# Altium PCB MICRO-GRUPO_5-5A.pcbDoc.PcbDoc
Units mm, origin at the board's own origin, x right, y up, seen from the top; angles counter-clockwise.
Board outline 72.14 x 49.15 mm, 2 copper layers (Top Layer, Bottom Layer); 28 components, 37 nets, 141 pads, 20 vias.
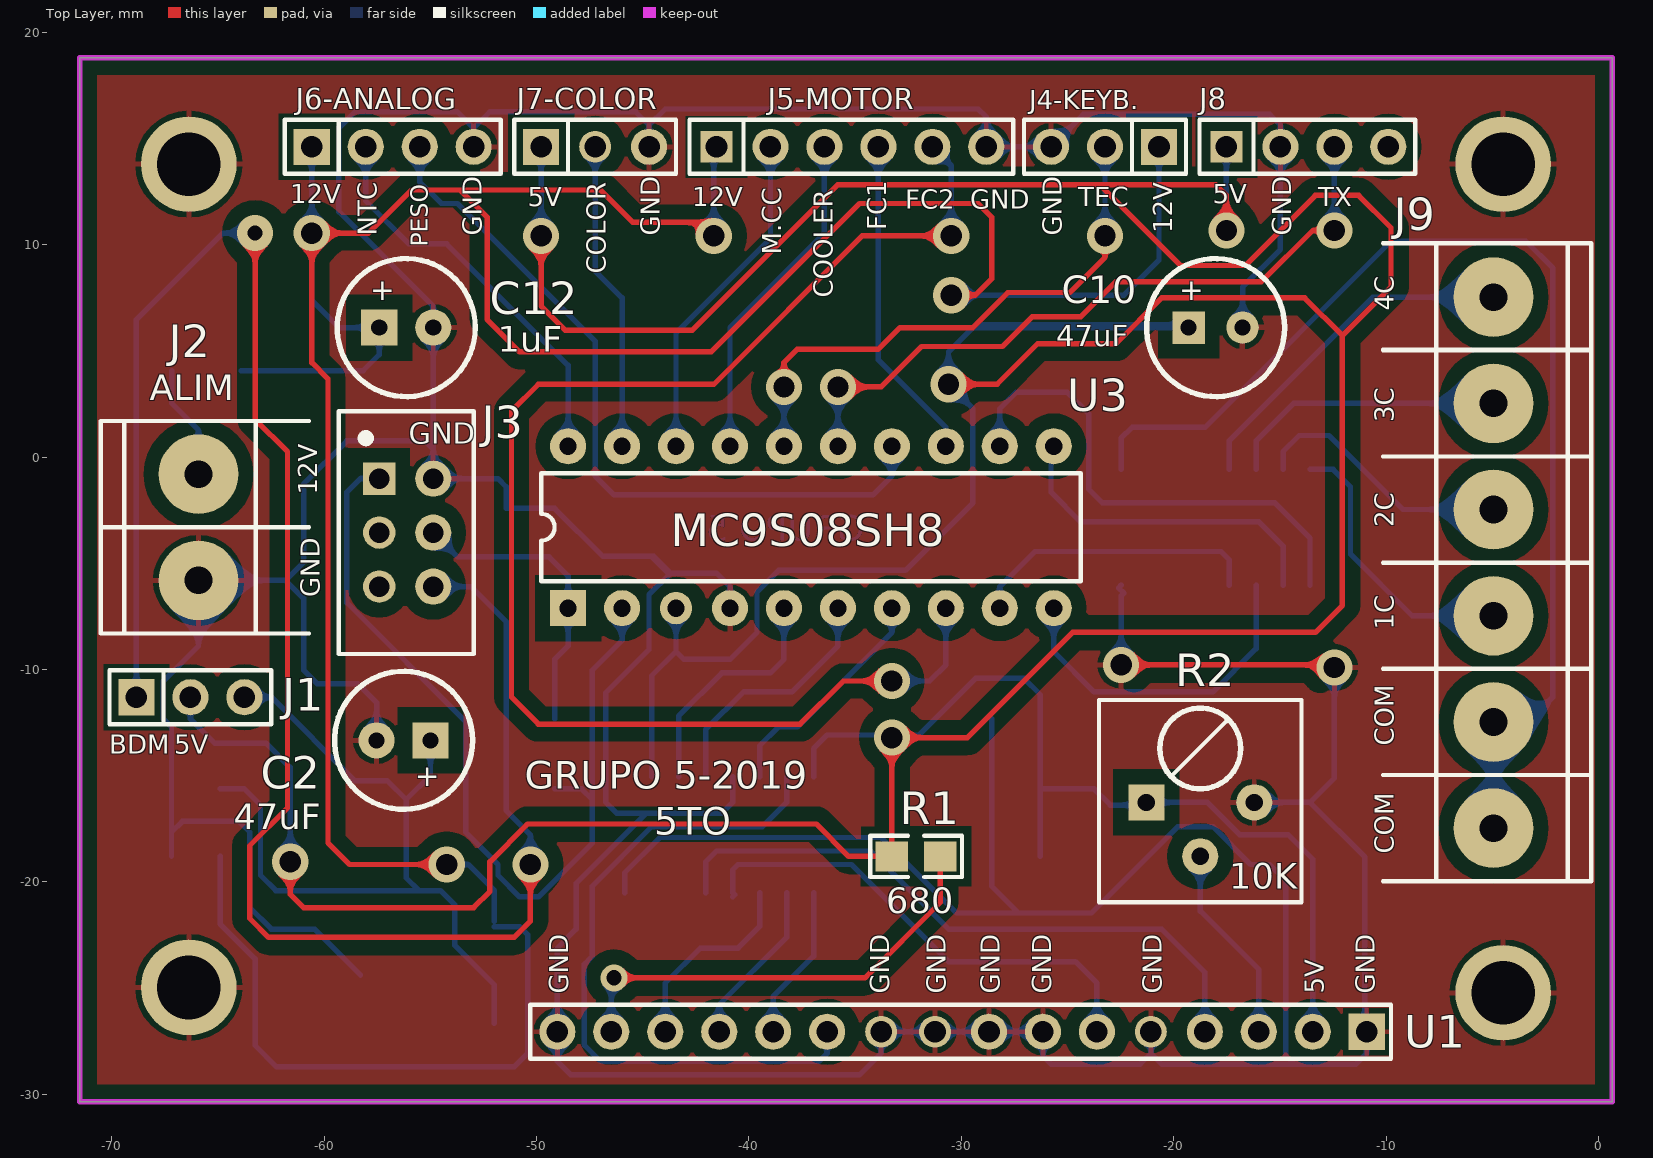
[diagram p0: Top Layer view]
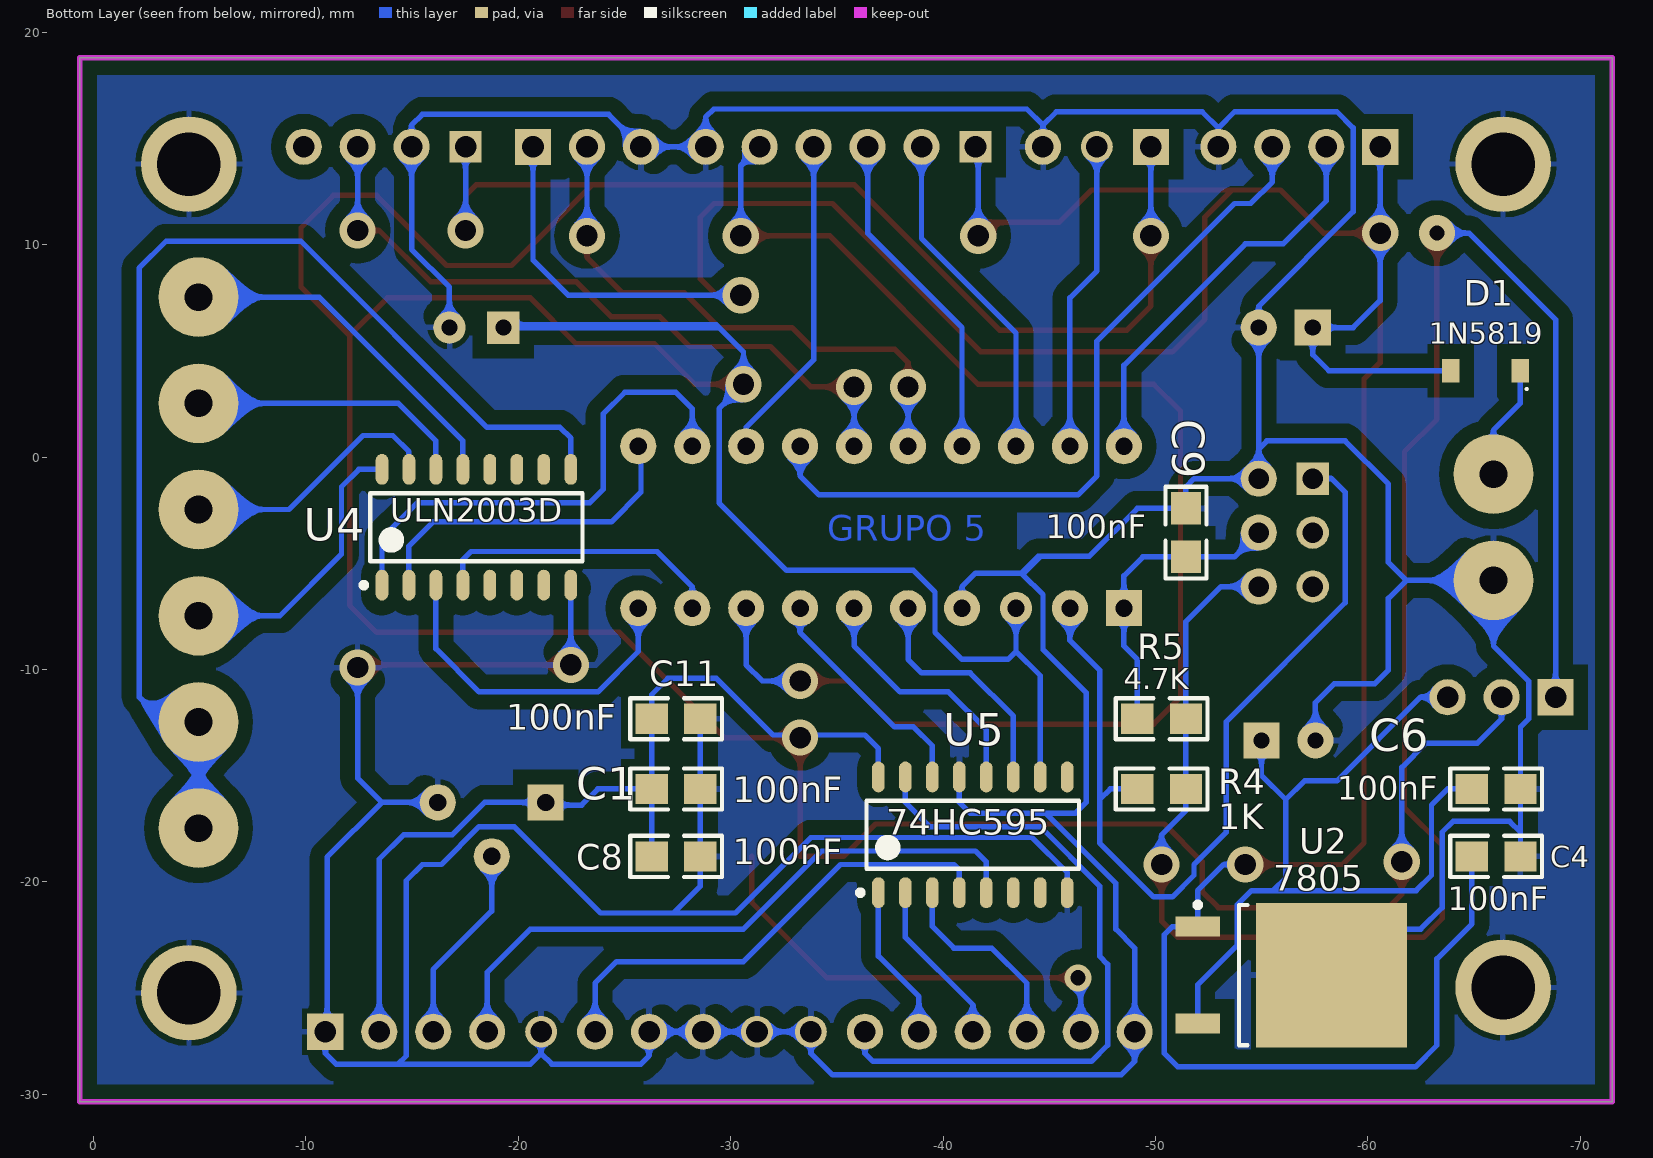
[diagram p1: Bottom Layer view, seen from below]

## Layer stack, top to bottom
Top Solder: solder mask 0.0102, Solder Resist, Dk 3.5
Top Layer: signal copper 0.0356
Dielectric 1: dielectric 0.32, FR-4, Dk 4.8
Bottom Layer: signal copper 0.0356
Bottom Solder: solder mask 0.0102, Solder Resist, Dk 3.5

## Board outline
-71.501,18.796 -71.501,-30.353 0.635,-30.353 0.635,18.796

## Design rules (kind name [scope] priority, off if disabled: settings)
Clearance Clearance_polygon [InPolygon] p1: gap=0.7
Clearance [All] p2: gap=0.254
PolygonConnect [All] p1: connectstyle=Relief reliefconductorwidth=0.254 reliefentries=4 polygonreliefangle="90 Angle" airgapwidth=0.254
RoutingVias [All] p1: holewidth=0.711 width=1.27 viastyle="Through Hole" minholewidth=0.711 minwidth=1.27 maxholewidth=0.711 maxwidth=1.27
SolderMaskExpansion [All] p1: expansion=0.102
UnpouredPolygon [All] p1: allowunpoured=FALSE
Width [All] p1: maxlimit=0.254 minlimit=0.254 preferedwidth=0.254
29 further rules are at their usual default settings.

## Components (designator, comment, footprint, x,y, rotation, side; value= is the part's Value field where it differs from the comment)
C1 "100nF" 0805 -27.432,-15.621 r0 bottom
C2 "47uF" CAPOL#1 -56.261,-13.335 r180 top
C4 "100nF" 0805 -66.04,-18.796 r180 bottom
C6 "100nF" 0805 -66.04,-15.621 r180 bottom
C8 "100nF" 0805 -27.432,-18.796 r0 bottom
C9 "100nF" 0805 -51.435,-3.556 r90 bottom
C10 "47uF" CAPOL#2 -18.034,6.096 r0 top
C11 "100nF" 0805 -27.432,-12.319 r180 bottom
C12 "1uF" CAPOL#1 -56.134,6.096 r0 top
D1 "1N5819" DIODO -65.532,4.064 r0 bottom
J1 "POWER SELECT" JUMPER_3 -66.294,-11.303 r0 top
J2 "ALIM" BORNERA2 -65.913,-3.302 r0 top
J3 "BDM_FREESCALE" SIP3*2 -57.404,-1.016 r270 top
J4-KEYB. "Teclado" SIP3#1 -23.241,14.605 r180 top (schematic designator J4)
J5-MOTOR "MOTOR CC" SIP6 -41.529,14.605 r0 top (schematic designator J5)
J6-ANALOG "S.ANALOG" SIP4#1 -56.769,14.605 r0 top (schematic designator J6)
J7-COLOR "S.DIG" SIP3#2 -47.244,14.605 r0 top (schematic designator J7)
J8 "communication" SIP4#2 -13.716,14.605 r0 top
J9 "MOTOR PP" BORNERA6 -4.953,-4.953 r180 top
R1 "680" 0805 -32.131,-18.796 r180 top
R2 "PRESET" "PRESET H" -18.796,-16.256 r0 top
R4 "1K" 0805 -50.292,-15.621 r180 bottom
R5 "4.7K" 0805 -50.292,-12.319 r180 bottom
U1 "LCD" LCD -21.082,-27.051 r180 top
U2 "7805" "7805 smd" -56.388,-24.384 r180 bottom
U3 "MC9S08SH8" DIP20 -48.514,-7.112 r90 top
U4 "ULN2003D" SOIC16 -18.034,-3.302 r90 bottom
U5 "74HC595" 74hc595_v2 -41.402,-17.78 r90 bottom

## Footprints (in the part's own frame and the unit in brackets; to place one, negate y for a bottom-side part, rotate by r counter-clockwise, add the part's x,y. Pads: shape width x height; smd on the part's side, far side on the other; paste and mask are expansions set on the pad)
74hc595_v2 [mm]
  oval 1.45x0.6 smd: 1(-2.725,4.445) 2(-2.725,3.175) 3(-2.725,1.905) 4(-2.725,0.635) 5(-2.725,-0.635) 6(-2.725,-1.905) 7(-2.725,-3.175) 8(-2.725,-4.445) 9(2.725,-4.445) 10(2.725,-3.175) 11(2.725,-1.905) 12(2.725,-0.635) 13(2.725,0.635) 14(2.725,1.905) 15(2.725,3.175) 16(2.725,4.445)
  silkscreen extent -2.85,-5 1.6,5.42, body extent -2,-5 2,5, height 1.75
0805 [mil] "Pasivo 0805"
  rect 60x56 smd: 1(-45,0) 2(45,0)
  silkscreen extent -85,-38 85,38, body extent -40,-24 39,25, height 15
"7805 smd" [mm] "D-PAK, 3-Pads, Body 6,20x6,66mm (max), IPC Medium Density"
  rect 2.1x0.95 smd: 1(-4.4,2.28) 3(-4.4,-2.28)
  rect 7.1x6.8 smd: 2(1.9,0)
  silkscreen extent -4.52,-3.3 -2.05,3.43, body extent -2.45,-3.3 3.75,3.3, height 2.4
BORNERA2 [mm] "Bornera con Tornillos 5mm separaci�n"
  round 3.75 hole 1.3: 1(0,2.5) 2(0,-2.5)
  silkscreen extent -4.6,-5 5.2,5, body extent -3.76,-4.89 3.94,5.61, height 10
BORNERA6 [mm] "Bornera con Tornillos 5mm separaci�n"
  round 3.75 hole 1.3: 1(0,12.517) 2(0,7.517) 3(0,2.516) 4(0,-2.484) 5(0,-7.484) 6(0,-12.484)
  silkscreen extent -4.6,-15.02 5.2,15.02, body extent -3.76,-14.86 3.94,15.62, height 10.05
CAPOL#1 [mm] "Body diameter 6.5mm"
  rect 1.7x1.7 hole 0.762: 1(-1.27,0)
  round 1.7 hole 0.762: 2(1.27,0)
  silkscreen extent -3.25,-3.25 3.25,3.25, body extent -3.15,-3.18 3.2,3.18, height 11.53
CAPOL#2 [mm] "Body diameter 6.5mm"
  rect 1.524x1.524 hole 0.762: 1(-1.27,0)
  round 1.524 hole 0.762: 2(1.27,0)
  silkscreen extent -3.25,-3.25 3.25,3.25, body extent -3.15,-3.18 3.2,3.18, height 11.53
DIODO [mm] "SODFL, 2-Leads, Body 1,60x3,60mm, IPC Medium Density"
  rect 0.81x1.12 smd: 1(-1.635,0) 2(1.635,0)
  silkscreen extent -1.99,0.81 -1.89,0.91, body extent -1.4,-0.85 1.4,0.85, height 1.3
DIP20 [mm]
  rect 1.7x1.7 hole 0.813: 1(0,0)
  round 1.7 hole 0.813: 2(0,-2.54) 4(0,-7.62) 5(0,-10.16) 6(0,-12.7) 7(0,-15.24) 8(0,-17.78) 9(0,-20.32) 10(0,-22.86) 11(7.62,-22.86) 12(7.62,-20.32) 13(7.62,-17.78) 14(7.62,-15.24) 15(7.62,-12.7) 16(7.62,-10.16) 17(7.62,-7.62) 18(7.62,-5.08) 19(7.62,-2.54) 20(7.62,0)
  round 1.524 hole 0.813: 3(0,-5.08)
  silkscreen extent 1.27,-24.13 6.35,1.27, body extent -1.29,-24.2 8.71,1.4, height 10
JUMPER_3 [mm]
  rect 1.7x1.7 hole 1.016: 1(-2.54,0)
  round 1.7 hole 1.016: 2(0,0) 3(2.54,0)
  silkscreen extent -3.81,-1.27 3.81,1.27, body extent -3.81,-1.3 3.81,1.27, height 16.15
LCD [mm]
  rect 1.7x1.7 hole 1.016: 1(-10.16,0)
  round 1.7 hole 1.016: 2(-7.62,0) 3(-5.08,0) 4(-2.54,0) 6(2.54,0) 7(5.08,0) 8(7.62,0) 11(15.24,0) 12(17.78,0) 13(20.32,0) 14(22.86,0) 15(25.4,0) 16(27.94,0)
  round 1.5 hole 1.016: 5(0,0) 9(10.16,0) 10(12.7,0)
  silkscreen extent -11.3,-1.27 29.21,1.27, body extent -11.43,-1.27 29.21,1.27, height 8.38
"PRESET H" [mm]
  rect 1.7x1.7 hole 0.813: 1(-2.5,0)
  round 1.7 hole 0.813: 2(0.04,-2.54) 3(2.58,0)
  silkscreen extent -4.72,-4.7 4.8,4.83, body extent -4.83,-4.76 4.7,4.77, height 5
SIP3#1 [mm]
  rect 1.7x1.7 hole 1.016: 1(-2.54,0)
  round 1.7 hole 1.016: 2(0,0) 3(2.54,0)
  silkscreen extent -3.81,-1.27 3.81,1.27, body extent -3.81,-1.3 3.81,1.24, height 8.38
SIP3#2 [mm]
  rect 1.7x1.7 hole 1.016: 1(-2.54,0)
  round 1.5 hole 1.016: 2(0,0)
  round 1.7 hole 1.016: 3(2.54,0)
  silkscreen extent -3.81,-1.27 3.81,1.27, body extent -3.81,-1.3 3.81,1.24, height 8.38
SIP3*2 [mil]
  rect 60x60 hole 38: 1(0,0)
  round 66.93 hole 38: 2(0,100) 4(100,100) 6(200,100)
  round 60 hole 38: 3(100,0) 5(200,0)
  silkscreen extent -125,-75 325,175, body extent -50,-51 250,149, height 398
SIP4#1 [mm]
  rect 1.7x1.7 hole 1.016: 1(-3.81,0)
  round 1.7 hole 1.016: 2(-1.27,0) 3(1.27,0) 4(3.81,0)
  silkscreen extent -5.08,-1.27 5.08,1.27, body extent -5.08,-1.27 5.08,1.27, height 8.38
SIP4#2 [mm]
  rect 1.5x1.5 hole 1.016: 1(-3.81,0)
  round 1.7 hole 1.016: 2(-1.27,0) 3(1.27,0) 4(3.81,0)
  silkscreen extent -5.08,-1.27 5.08,1.27, body extent -5.08,-1.27 5.08,1.27, height 8.38
SIP6 [mm]
  rect 1.5x1.5 hole 1.016: 1(0,0)
  round 1.7 hole 1.016: 2(2.54,0) 3(5.08,0) 4(7.62,0) 5(10.16,0) 6(12.7,0)
  silkscreen extent -1.27,-1.27 13.97,1.27, body extent -1.27,-1.3 13.97,1.24, height 8.38
SOIC16 [mm] "controlador de corriente"
  oval 1.45x0.6 smd: 1(-2.725,4.445) 2(-2.725,3.175) 3(-2.725,1.905) 4(-2.725,0.635) 5(-2.725,-0.635) 6(-2.725,-1.905) 7(-2.725,-3.175) 8(-2.725,-4.445) 9(2.725,-4.445) 10(2.725,-3.175) 11(2.725,-1.905) 12(2.725,-0.635) 13(2.725,0.635) 14(2.725,1.905) 15(2.725,3.175) 16(2.725,4.445)
  silkscreen extent -2.85,-5 1.6,5.42, body extent -2,-5 2,5, height 1.75

## Part data
C1 C4 C6 C8 C9 C11: library part CAP, "cap"
C2 C10 C12: library part CAPPOL, "Cap polarizado"
D1: library part "DIODO SCHOTTKY", "Diodo"
J1: library part JUMPER_3, "Jumper"
J2: library part Bornera_2, "Bornera de 2 pines"
J3: library part BDM, "BDM"
J4-KEYB. J7-COLOR: library part CON3
J5-MOTOR: library part CON6
J6-ANALOG J8: library part CON4
J9: library part "BORNERA 6", "current output"
R1 R4 R5: library part RES, "Resistencia"
U1: library part "LCD 16*4"
U2: library part 78XX, "REGULDOR POSITIVO"
U3: "Micro controlador"
U4: "Controlador de corriente"

## Free pads (board coordinates)
  round 4.5 hole 3: 0(-66.366,-24.964) 1(-66.366,13.788) 2(-4.5,13.788) 3(-4.5,-25.218)

## Via types
v1: diameter 1.7, hole 1, Top Layer to Bottom Layer, 18 vias
v2: diameter 1.7, hole 0.7, Top Layer to Bottom Layer, 1 vias
v3: diameter 1.27, hole 0.711, Top Layer to Bottom Layer, 1 vias

## Nets (pads, with @x,y where several pads share a name; then routed paths per layer and width w, separated by ;. In a path a pad name is that pad's centre, name@x,y a point inside that pad or via, vN(x,y) a via of type N, cw(c..) or ccw(c..) an arc to the next point about the centre after c; other vN are vias at no path point)
5V: C1.2 C8.2 C10.1 C11.1 J1.2 J7-COLOR.1 J8.1 R1.2 R2.1 U1.2 U3.3 U5.10 U5.16 | length 279.6
  Top Layer w0.254: v1(-61.595,-19.05) -61.595,-20.574 -60.96,-21.209 -52.959,-21.209 -52.197,-20.447 -52.197,-19.05 -50.419,-17.272 -36.83,-17.272 -35.306,-18.796 R1.2 v1(-33.274,-13.208) -29.718,-13.208 -24.765,-8.255 -13.335,-8.255 -12.065,-6.985 -12.065,5.715 ; v1(-49.784,10.414) -49.784,7.112 -48.641,5.969 -42.672,5.969 -35.814,12.827 -23.495,12.827 ; v1(-30.607,3.429) -28.321,3.429 -26.416,5.334 -22.733,5.334 -20.574,7.493 -13.843,7.493 -12.065,5.715 ; v1(-17.526,10.668) -17.526,12.319 -18.034,12.827 -23.495,12.827 ; -23.495,12.827 -19.685,9.017 -16.637,9.017 -13.335,12.319 -11.303,12.319 -9.779,10.795 -9.779,8.001 -12.065,5.715
  Bottom Layer w0.254: J1.2 -66.294,-12.319 -65.151,-13.462 -62.738,-13.462 -61.595,-14.605 v1(-61.595,-19.05) ; v1(-49.784,10.414) J7-COLOR.1 ; U5.10 -44.577,-10.287 -43.434,-9.144 ; U3.3 -43.434,-9.144 ; U5.16 -36.957,-13.716 -36.322,-13.081 -32.004,-13.081 -29.337,-10.414 -27.051,-10.414 -26.289,-11.176 C11.1 C1.2 ; C8.2 C1.2 ; v1(-17.526,10.668) J8.1 ; U1.2 -13.462,-18.923 -14.605,-17.78 -16.891,-17.78 -18.415,-16.256 R2.1 -21.423,-16.383 -22.987,-16.383 -23.749,-15.621 C1.2 ; -43.434,-9.144 -43.053,-9.525 -40.894,-9.525 -39.624,-8.255 -39.624,-6.35 -38.608,-5.334 -32.639,-5.334 -29.464,-2.159 -29.464,2.286 v1(-30.607,3.429) -30.607,4.953 -29.464,6.096 ; -29.464,6.096 C10.1 -19.431,6.223 -29.337,6.223 -29.464,6.096
12V: C4.1 C12.1 D1.2 J4-KEYB..1 J5-MOTOR.1 J6-ANALOG.1 U2.1 | length 168.5
  Top Layer w0.254: v1(-54.229,-19.177) -58.801,-19.177 -59.817,-18.161 -59.817,3.683 -60.579,4.445 v1(-60.579,10.541) -57.912,10.541 -55.88,12.573 -53.594,12.573 ; v1@-41.529,11.049 -45.466,11.049 -46.99,12.573 -53.594,12.573 ; v1(-30.48,7.62) -29.337,7.62 -28.575,8.382 -28.575,11.303 -29.21,11.938 -34.798,11.938 -41.783,4.953 -50.8,4.953 -52.324,6.477 -52.324,11.303 -53.594,12.573
  Bottom Layer w0.254: C4.1 -64.897,-21.971 -63.246,-23.622 -63.246,-27.686 -62.23,-28.702 -51.054,-28.702 -50.419,-28.067 -50.419,-22.479 -50.794,-22.104 U2.1 ; D1.2 -58.166,4.064 -57.404,4.826 C12.1 -59.309,6.096 -60.579,7.366 v1(-60.579,10.541) J6-ANALOG.1 ; v1(-54.229,-19.177) -53.213,-19.177 -51.988,-20.402 U2.1@-51.988,-21.85 ; v1(-41.656,10.414) -41.656,14.478 J5-MOTOR.1 ; v1(-30.48,7.62) -22.352,7.62 -20.701,9.271 J4-KEYB..1
COLOR: J7-COLOR.2 U3.19 | length 14.6
  Bottom Layer w0.254: J7-COLOR.2 -47.244,8.763 -45.974,7.493 U3.19
COM_TX: J8.3 U3.15 | length 33.2
  Top Layer w0.254: v1(-35.814,3.302) -33.782,3.302 -31.877,5.207 -28.067,5.207 -26.67,6.604 -24.384,6.604 -22.733,8.255 -15.875,8.255 -13.462,10.668 v1(-12.446,10.668)
  Bottom Layer w0.254: U3.15 v1(-35.814,3.302) ; v1(-12.446,10.668) J8.3
COOLER: J5-MOTOR.3 U3.17 | length 15.9
  Bottom Layer w0.254: U3.17 -40.894,3.302 -40.894,6.096 -36.449,10.541 J5-MOTOR.3
FC1: J5-MOTOR.4 U3.13 | length 15.4
  Bottom Layer w0.254: J5-MOTOR.4 -33.909,4.572 -30.734,1.397 U3.13
FC2: J5-MOTOR.5 U3.8 | length 66.9
  Top Layer w0.254: v1(-33.274,-10.541) -35.56,-10.541 -37.592,-12.573 -49.911,-12.573 -51.181,-11.303 -51.181,2.159 -49.911,3.429 -41.656,3.429 -34.671,10.414 v1(-30.48,10.414)
  Bottom Layer w0.254: v1(-33.274,-10.541) -31.496,-10.541 -30.734,-9.779 U3.8 ; J5-MOTOR.5 -30.48,13.716 v1(-30.48,10.414)
GND: C1.1 C2.2 C4.2 C6.2 C8.1 C9.2 C10.2 C11.2 C12.2 J2.2 J3.2 J4-KEYB..3 J5-MOTOR.6 J6-ANALOG.4 J7-COLOR.3 J8.2 pad.0 pad.1 pad.2 pad.3 R2.3 U1.1 U1.5 U1.7 U1.8 U1.9 U1.10 U1.16 U2.2 U3.4 U4.8 U5.8 U5.13 | length 319.6
  Top Layer w0.254: v1(-22.479,-9.779) -12.573,-9.779 v1(-12.446,-9.906)
  Bottom Layer w0.254: C4.2 -67.183,-17.653 ; U2.2 -60.447,-22.225 -62.484,-22.225 -63.5,-21.209 -63.5,-17.653 -64.008,-17.145 -66.675,-17.145 -67.183,-17.653 ; C2.2 -57.531,-11.557 -58.42,-10.668 -60.325,-10.668 -60.96,-10.033 -60.96,-6.651 -61.809,-5.802 ; J6-ANALOG.4 -52.959,15.494 ; U5.8 -45.847,-19.558 -44.196,-17.907 -33.782,-17.907 -30.226,-21.463 -27.305,-21.463 ; J7-COLOR.3 -44.704,15.621 ; U3.4 -40.894,-6.096 -41.529,-5.461 -43.688,-5.461 -44.485,-4.664 -44.612,-4.664 ; U5.13 -40.767,-16.256 -41.275,-16.764 -44.831,-16.764 ; C11.2 C1.1 C8.1 -28.575,-20.193 -27.305,-21.463 ; v1(-22.479,-9.779) -22.479,-6.535 -22.352,-6.408 -22.606,-6.154 U4.8 ; U1.5 -21.082,-28.067 ; C10.2@-16.764,6.223 -16.764,8.001 -14.986,9.779 J8.2 -14.986,15.621 -15.494,16.129 -24.257,16.129 J4-KEYB..3 J5-MOTOR.6 -28.829,16.002 -29.21,16.383 -43.942,16.383 -44.704,15.621 ; R2.3 -13.589,-16.256 ; v1(-12.446,-9.906) -12.446,-15.113 -13.589,-16.256 ; -67.183,-17.653 C6.2 -67.183,-12.7 -67.564,-12.319 -67.564,-10.541 -65.913,-8.89 J2.2 -61.809,-5.802 ; -61.809,-5.802 -60.96,-4.953 -60.96,-1.27 -58.928,0.762 -55.245,0.762 -54.864,0.381 ; -54.864,0.381 J3.2 -51.816,-1.016 -51.435,-1.397 C9.2 -49.149,-2.413 -46.898,-4.664 -44.612,-4.664 ; -54.864,0.381 C12.2 -54.864,7.112 -59.309,11.557 -59.309,15.494 -58.547,16.256 -53.721,16.256 -52.959,15.494 ; -52.959,15.494 -52.197,16.256 -45.339,16.256 -44.704,15.621 ; -44.831,-16.764 -46.228,-16.764 -46.736,-16.256 -46.736,-11.093 -44.704,-9.061 -44.704,-6.477 -43.752,-5.524 -44.612,-4.664 ; -44.831,-16.764 -48.133,-20.066 -48.133,-22.225 -49.022,-23.114 U1.16 -49.022,-28.448 -48.387,-29.083 -34.798,-29.083 -33.782,-28.067 U1.10 U1.9 U1.8 U1.7 -26.162,-28.194 -25.781,-28.575 -21.59,-28.575 -21.082,-28.067 ; -27.305,-21.463 -23.876,-21.463 -19.812,-17.399 -18.161,-17.399 -16.383,-19.177 -15.494,-19.177 -14.732,-19.939 -14.732,-28.194 -14.351,-28.575 ; -21.082,-28.067 -20.574,-28.575 -14.351,-28.575 ; -14.351,-28.575 -11.43,-28.575 -10.922,-28.067 U1.1 -11.009,-26.964 -11.009,-18.836 -13.589,-16.256
LCD_CLK: U3.5 U5.11 | length 11.3
  Bottom Layer w0.254: U5.11 -43.307,-12.192 -41.275,-10.16 -38.989,-10.16 -38.354,-9.525 U3.5
LCD_DATA: U3.7 U5.14 | length 11
  Bottom Layer w0.254: U5.14 -39.497,-13.589 -38.608,-12.7 -37.719,-12.7 -33.274,-8.255 U3.7
LCD_HAB: U3.6 U5.12 | length 11.9
  Bottom Layer w0.254: U5.12 -42.037,-12.827 -40.259,-11.049 -37.973,-11.049 -35.814,-8.89 U3.6
"MOTOR CC": J5-MOTOR.2 U3.18 | length 15.9
  Bottom Layer w0.254: U3.18 -43.434,5.842 -38.989,10.287 J5-MOTOR.2
NetC2_1: C2.1 C6.1 J1.3 U2.3 | length 39
  Bottom Layer w0.254: C6.1 -63.754,-15.621 -62.992,-16.383 -62.992,-19.685 -62.269,-20.408 -55.538,-20.408 ; J1.3 -62.484,-11.303 -58.547,-15.24 -57.023,-15.24 -56.134,-16.129 ; C2.1 -54.991,-14.986 -56.134,-16.129 ; U2.3 -51.988,-24.847 -53.848,-22.987 -53.848,-21.081 -54.521,-20.408 -55.538,-20.408 ; -56.134,-16.129 -56.134,-19.812 -55.538,-20.408
NetC9_1: C9.1 J3.4 R5.1 U3.1 | length 14.2
  Bottom Layer w0.254: J3.4 -53.721,-4.699 C9.1 -49.403,-4.699 -48.514,-5.588 U3.1 -48.514,-8.89 -49.149,-9.525 R5.1
NetD1_1: D1.1 J2.1 | length 5.4
  Bottom Layer w0.254: D1.1 -67.167,2.524 -65.913,1.27 J2.1
NetJ3_1: J3.1 R4.1 U3.2 | length 42.3
  Bottom Layer w0.254: J3.1 -58.293,-1.016 -58.928,-1.651 -58.928,-6.858 -53.34,-12.446 -53.34,-17.653 -51.816,-19.177 -51.816,-19.685 -50.8,-20.701 -49.911,-20.701 -47.371,-18.161 -47.371,-16.129 ; R4.1 -47.879,-15.621 -47.371,-16.129 ; U3.2 -45.974,-8.636 -47.371,-10.033 -47.371,-16.129
NetJ9_1: J9.1 J9.2 U4.9 | length 54.6
  Bottom Layer w0.254: U4.9 -22.479,0.889 -21.971,1.397 -18.542,1.397 -9.779,10.16 -3.429,10.16 -2.159,8.89 -2.159,-11.303 -3.326,-12.47 J9.2 J9.1
NetJ9_3: J9.3 U4.16 | length 13.4
  Bottom Layer w0.254: U4.16 -12.504,-0.577 -11.684,-1.397 -11.684,-4.572 -8.787,-7.469 J9.3
NetJ9_4: J9.4 U4.15 | length 12.5
  Bottom Layer w0.254: U4.15 -14.859,0.254 -14.097,1.016 -12.7,1.016 -9.215,-2.469 J9.4
NetJ9_5: J9.5 U4.14 | length 13.2
  Bottom Layer w0.254: U4.14 -16.129,0.762 -14.36,2.531 J9.5
NetJ9_6: J9.6 U4.13 | length 16.6
  Bottom Layer w0.254: U4.13 -17.399,0.762 -10.63,7.531 J9.6
NetR1_1: R1.1 U1.15 | length 21.6
  Top Layer w0.254: v3(-46.355,-24.511) -34.544,-24.511 -30.988,-20.955 R1.1
  Bottom Layer w0.254: U1.15 -46.482,-24.638 v3(-46.355,-24.511)
NetR2_2: R2.2 U1.3 | length 9.4
  Bottom Layer w0.254: R2.2 -18.756,-21.376 -16.002,-24.13 U1.3
NetU1_4: U1.4 U5.5 | length 30.3
  Bottom Layer w0.254: U5.5 -42.037,-19.05 -41.529,-18.542 -34.29,-18.542 -30.607,-22.225 -20.574,-22.225 -18.542,-24.257 U1.4
NetU1_6: U1.6 U5.4 | length 23.1
  Bottom Layer w0.254: U5.4@-40.767,-20.701 U5.4@-40.669,-20.603 ; U5.4 -40.767,-19.431 -40.513,-19.177 -35.179,-19.177 -30.607,-23.749 -24.638,-23.749 -23.622,-24.765 U1.6
NetU1_11: U1.11 U5.15 | length 32.5
  Bottom Layer w0.254: U5.15 -38.227,-16.256 -39.37,-17.399 -44.577,-17.399 -47.371,-20.193 -47.371,-23.495 -47.752,-23.876 -47.752,-27.686 -46.99,-28.448 -36.703,-28.448 -36.322,-28.067 U1.11
NetU1_12: U1.12 U5.1 | length 7.3
  Bottom Layer w0.254: U1.12 -38.862,-25.4 -36.957,-23.495 U5.1
NetU1_13: U1.13 U5.2 | length 7.9
  Bottom Layer w0.254: U1.13 -41.402,-25.781 -38.227,-22.606 U5.2
NetU1_14: U1.14 U5.3 | length 9.4
  Bottom Layer w0.254: U1.14 -43.942,-24.765 -42.291,-23.114 -40.513,-23.114 -39.497,-22.098 U5.3
NetU3_9: U3.9 U4.4 | length 13.9
  Bottom Layer w0.254: U3.9 -28.194,-6.096 -26.543,-4.445 -17.78,-4.445 -17.399,-4.826 U4.4
NetU3_10: U3.10 U4.3 | length 16.2
  Bottom Layer w0.254: U3.10 -25.654,-9.144 -23.749,-11.049 -18.161,-11.049 -16.129,-9.017 U4.3
NetU3_11: U3.11 U4.2 | length 16
  Bottom Layer w0.254: U3.11 -25.781,0.381 -25.781,-1.651 -24.384,-3.048 -16.002,-3.048 -14.859,-4.191 U4.2
NetU3_12: U3.12 U4.1 | length 23.8
  Bottom Layer w0.254: U3.12 -28.194,2.286 -27.432,3.048 -25.019,3.048 -24.003,2.032 -24.003,-1.524 -23.368,-2.159 -15.24,-2.159 -13.589,-3.81 U4.1
NTC: J6-ANALOG.2 U3.20 | length 19.1
  Bottom Layer w0.254: J6-ANALOG.2 -58.039,12.065 -56.007,10.033 -54.229,10.033 -48.514,4.318 U3.20
PESO: J6-ANALOG.3 U3.14 | length 35.5
  Bottom Layer w0.254: J6-ANALOG.3 -55.499,12.954 -54.483,11.938 -53.721,11.938 -47.244,5.461 -47.244,-0.889 -46.355,-1.778 -34.163,-1.778 -33.274,-0.889 U3.14
TECLADO: J4-KEYB..2 U3.16 | length 26.3
  Top Layer w0.254: v1(-38.354,3.302) -38.354,4.445 -37.719,5.08 -33.909,5.08 -32.893,6.096 -29.464,6.096 -27.813,7.747 -24.892,7.747 -23.241,9.398 v1(-23.241,10.414)
  Bottom Layer w0.254: U3.16 v1(-38.354,3.302) ; v1(-23.241,10.414) J4-KEYB..2
VDD_BDM: J1.1 J3.6 R4.2 R5.2 | length 91.3
  Top Layer w0.254: v2(-63.246,10.541) -63.246,1.778 -61.722,0.254 -61.722,-16.51 -63.5,-18.288 -63.5,-21.717 -62.611,-22.606 -51.054,-22.606 -50.292,-21.844 v1(-50.292,-19.177)
  Bottom Layer w0.254: J1.1 -68.834,6.477 -64.77,10.541 v2(-63.246,10.541) ; J3.6 -53.086,-6.096 -51.435,-7.747 R5.2 R4.2 -51.435,-16.637 -50.292,-17.78 v1(-50.292,-19.177)
pads on no net: J3.3 J3.5 J8.4 U4.5 U4.6 U4.7 U4.10 U4.11 U4.12 U5.6 U5.7 U5.9

## Polygon pours and split planes (outlines as drawn)
GND on Bottom Layer "polygon1" (solid, remove dead copper, pour order 10): -71.501,18.796 0.635,18.796 0.635,-30.353 -71.501,-30.353
GND on Top Layer "polygon1" (solid, remove dead copper, pour order 12): -71.501,18.796 0.381,18.796 0.635,18.542 0.635,-30.353 -71.501,-30.353

## Keep-outs
Keep-Out Layer:
  lines w0.254: -71.501,-30.353 -71.501,-6.096 -71.501,18.796 -35.433,18.796 0.635,18.796 0.635,0 0.635,-30.353 -68.199,-30.353 -71.501,-30.353

## Other copper
Bottom Layer:
  text "GRUPO 5" at -34.544,-3.937 h1.2

## Silkscreen, mask and mechanical layers (free items; w line width, h text height)
Top Overlay:
  text "12V" at -61.595,11.938 h0.9
  text "5V" at -18.161,11.938 h0.9
  text "5V" at -50.419,11.811 h0.9
  text "12V" at -42.672,11.811 h0.9
  text "TEC" at -24.511,11.811 h0.9
  text "TX" at -13.208,11.811 h0.9
  text "FC2" at -32.639,11.684 h0.9
  text "GND" at -29.591,11.684 h0.9
  text "FC1" at -33.528,10.668 h0.9 r90
  text "12V" at -20.066,10.541 h0.9 r90
  text "NTC" at -57.531,10.414 h0.9 r90
  text "GND" at -52.578,10.414 h0.9 r90
  text "GND" at -44.196,10.414 h0.9 r90
  text "GND" at -25.273,10.414 h0.9 r90
  text "GND" at -14.478,10.414 h0.9 r90
  text "PESO" at -55.118,9.906 h0.8 r90
  text "M.CC" at -38.481,9.525 h0.9 r90
  text "COLOR" at -46.736,8.636 h0.9 r90
  text "COOLER" at -36.068,7.493 h0.9 r90
  text "4C" at -9.652,6.896 h0.9 r90
  text "ALIM" at -68.199,2.667 h1.2
  text "3C" at -9.652,1.651 h0.9 r90
  text "GND" at -56.007,0.635 h1
  text "12V" at -60.325,-1.778 h0.9 r90
  text "2C" at -9.652,-3.302 h0.9 r90
  text "GND" at -60.198,-6.604 h0.9 r90
  text "1C" at -9.652,-8.128 h0.9 r90
  text "COM" at -9.652,-13.589 h0.9 r90
  text "BDM" at -70.104,-13.97 h0.9
  text "5V" at -67.056,-13.97 h0.9
  text "GRUPO 5-2019" at -50.546,-15.621 h1.3
  text "5TO" at -44.45,-17.78 h1.3
  text "COM" at -9.652,-18.669 h0.9 r90
  text "10K" at -17.399,-20.32 h1.2
  text "GND" at -48.514,-25.273 h0.9 r90
  text "GND" at -33.401,-25.273 h0.9 r90
  text "GND" at -30.734,-25.273 h0.9 r90
  text "GND" at -28.194,-25.273 h0.9 r90
  text "GND" at -25.781,-25.273 h0.9 r90
  text "GND" at -20.574,-25.273 h0.9 r90
  text "5V" at -12.954,-25.273 h0.9 r90
  text "GND" at -10.541,-25.273 h0.9 r90
Mechanical 15:
  lines w0.254: -70.866,1.27 -70.866,18.288 0,18.288 0,-29.718 -70.866,-29.718 -70.866,1.651

## Text inside footprints (layer, text, board x,y; h text height)
C2: Top Overlay "+" at -54.559,-14.63 h1.02 r180
C10: Top Overlay "+" at -19.736,7.391 h1.02
C12: Top Overlay "+" at -57.836,7.391 h1.02